# Altium PCB Therm_Expand_PCB_Bottom.PcbDoc (part 2 of 2)
Units mm, origin at the board's own origin, x right, y up, seen from the top; angles counter-clockwise.
Board outline 85 x 66 mm, 2 copper layers (Top Layer, Bottom Layer); 45 components, 65 nets, 228 pads, 143 vias.
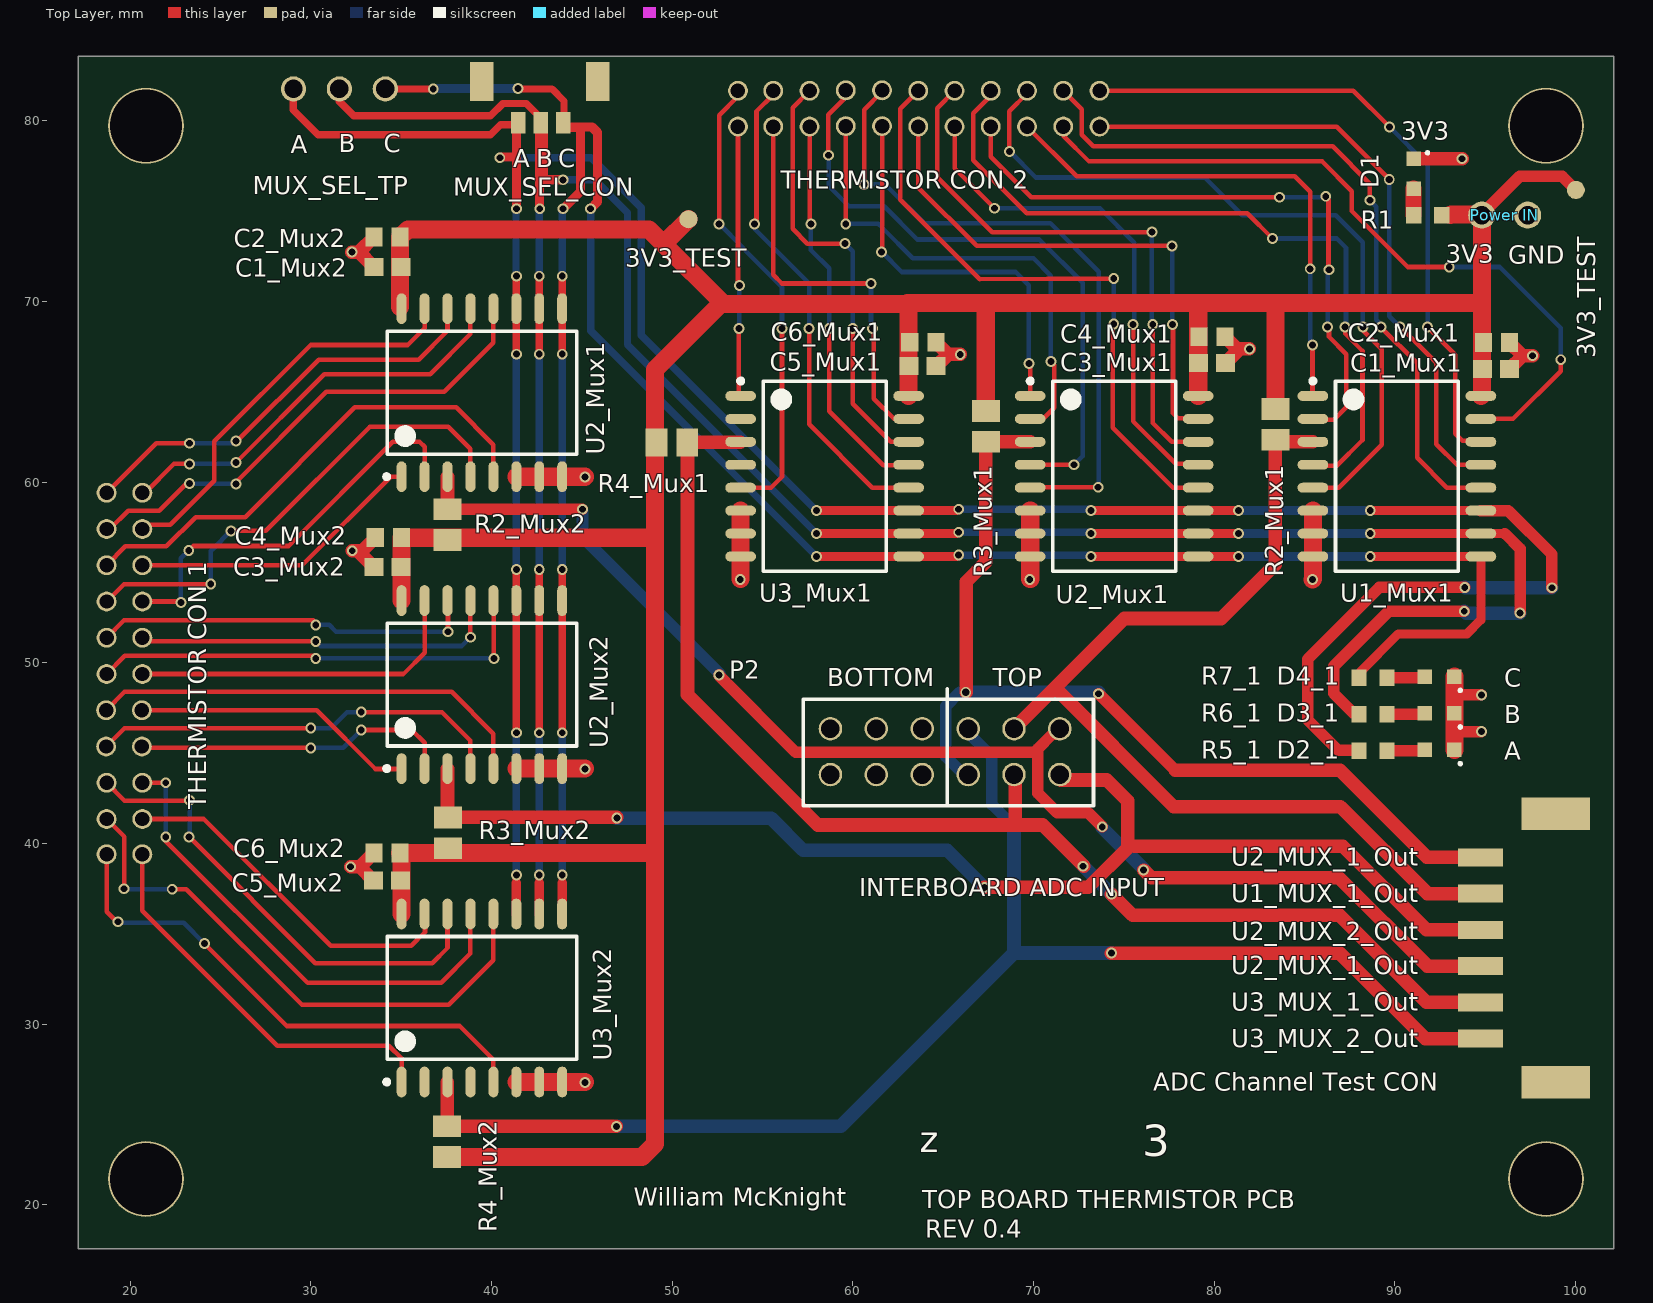
[diagram p0: Top Layer view]

## Via types
v1: diameter 0.6, hole 0.381, Top Layer to Bottom Layer, tented top, 141 vias
v2: diameter 0.6, hole 0.4, Top Layer to Bottom Layer, 2 vias

## Nets (pads, with @x,y where several pads share a name; then routed paths per layer and width w, separated by ;. In a path a pad name is that pad's centre, name@x,y a point inside that pad or via, vN(x,y) a via of type N, cw(c..) or ccw(c..) an arc to the next point about the centre after c; other vN are vias at no path point) (continued)
TS_IN15_U_AHK50H-ND_THERM_CONNECTOR2: (continued)
  Bottom Layer w0.254: v1@29.87,45.288 v1(29.997,45.288) 31.801,45.288 v1(32.791,46.279)
TS_IN16_U_AHK50H-ND_THERM_CONNECTOR1: "THERMISTOR CON 2.16" U2_Mux1.4@69.823,60.96 | length 34.7
  Top Layer w0.254: v1(58.661,78.092) 58.649,78.105 58.649,80.34 59.614,81.305 59.614,81.686 ; U2_Mux1.4@69.823,60.96 v1(72.238,60.96)
  Bottom Layer w0.254: v1(58.661,78.092) 58.661,76.391 59.131,75.921 59.792,75.26 61.747,75.26 63.576,73.431 70.333,73.431 72.72,71.044 72.72,61.443 v1(72.238,60.96)
TS_IN16_U_AHK50H-ND_THERM_CONNECTOR2: "THERMISTOR CON 1.16" U2_Mux2.4 | length 23.2
  Top Layer w0.254: 18.669,45.364 19.685,46.38 v1(29.997,46.38) ; v1(32.791,47.269) 37.262,47.269 38.837,45.695 U2_Mux2.4
  Bottom Layer w0.254: v1(29.997,46.38) 31.115,46.38 32.004,47.269 v1(32.791,47.269)
TS_IN17_U_AHK50H-ND_THERM_CONNECTOR1: "THERMISTOR CON 2.17" U3_Mux1.13 | length 21.8
  Top Layer w0.254: 57.607,79.68 57.607,74.295 v1@57.683,74.219 ; v1@58.699,68.555 58.699,63.932 61.697,60.935 63.07,60.935 U3_Mux1.13
  Bottom Layer w0.254: v1@57.683,74.219 57.683,72.847 58.699,71.831 v1@58.699,68.555
  other v1: 58.699,68.504 57.683,74.295
TS_IN17_U_AHK50H-ND_THERM_CONNECTOR2: "THERMISTOR CON 1.17" U3_Mux2.13 | length 27.5
  Top Layer w0.254: 20.676,43.358 v1(21.971,43.358) ; v1@21.92,40.361 21.946,40.335 21.946,40.157 29.82,32.283 37.211,32.283 38.837,33.909 U3_Mux2.13
  Bottom Layer w0.254: v1(21.971,40.361) v1(21.971,43.358)
TS_IN18_U_AHK50H-ND_THERM_CONNECTOR1: "THERMISTOR CON 2.18" U3_Mux1.14 | length 24.3
  Top Layer w0.254: 57.607,81.661 56.667,80.721 56.667,74.016 57.48,73.203 v1(59.563,73.203) ; v1@59.995,68.555 59.995,64.338 62.103,62.23 U3_Mux1.14
  Bottom Layer w0.254: v1(59.563,73.203) 59.995,72.771 v1@59.995,68.555
  other v1: 59.995,68.504
TS_IN18_U_AHK50H-ND_THERM_CONNECTOR2: "THERMISTOR CON 1.18" U3_Mux2.14 | length 26.6
  Top Layer w0.254: 18.694,43.358 19.685,42.367 23.216,42.367 23.292,42.291 v1(23.292,42.393) ; v1(23.266,40.361) 30.251,33.376 36.728,33.376 37.567,34.214 U3_Mux2.14
  Bottom Layer w0.254: v1(23.266,40.361) 23.266,40.462 23.292,40.488 v1(23.292,42.393)
TS_IN19_U_AHK50H-ND_THERM_CONNECTOR1: "THERMISTOR CON 2.19" U3_Mux1.15 | length 22.6
  Top Layer w0.254: 55.601,79.68 55.601,71.476 56.083,70.993 v1(61.011,70.993) ; v1@61.087,68.478 61.163,68.402 61.163,64.618 62.281,63.5 U3_Mux1.15
  Bottom Layer w0.254: v1(61.011,70.993) 61.011,68.555 v1@61.087,68.478
  other v1: 61.087,68.504
TS_IN19_U_AHK50H-ND_THERM_CONNECTOR2: "THERMISTOR CON 1.19" U3_Mux2.15 | length 19.9
  Top Layer w0.254: 20.676,41.351 24.079,41.351 31.105,34.325 35.55,34.325 36.322,35.097 36.322,36.019 36.271,36.07 U3_Mux2.15
TS_IN20_U_AHK50H-ND_THERM_CONNECTOR1: "THERMISTOR CON 2.20" U3_Mux1.12 | length 27.1
  Top Layer w0.254: v1(54.559,74.295) 54.67,74.405 54.67,80.52 55.601,81.451 55.601,81.661 ; v1(57.582,68.504) 57.582,63.195 61.087,59.69 U3_Mux1.12
  Bottom Layer w0.254: v1(54.559,74.295) 54.559,74.016 57.582,70.993 v1(57.582,68.504)
TS_IN20_U_AHK50H-ND_THERM_CONNECTOR2: "THERMISTOR CON 1.20" U3_Mux2.12 | length 31
  Top Layer w0.254: 18.694,41.351 19.685,40.361 v1@19.685,37.49 ; v1(22.327,37.465) 23.114,37.465 29.515,31.064 37.643,31.064 40.107,33.528 U3_Mux2.12
  Bottom Layer w0.254: v1(19.66,37.49) 19.685,37.465 v1(22.327,37.465)
TS_IN21_U_AHK50H-ND_THERM_CONNECTOR1: "THERMISTOR CON 2.21" U3_Mux1.1 | length 14.7
  Top Layer w0.254: 53.645,79.68 53.645,70.968 v1(53.721,70.891) ; v1@53.696,68.25 53.696,64.87 U3_Mux1.1
  Bottom Layer w0.254: v1(53.696,68.504) 53.721,68.529 v1(53.721,70.891)
TS_IN21_U_AHK50H-ND_THERM_CONNECTOR2: "THERMISTOR CON 1.21" U3_Mux2.1 | length 22.2
  Top Layer w0.254: 20.676,39.395 20.676,36.271 28.143,28.804 34.315,28.804 35.027,28.092 U3_Mux2.1
TS_IN22_U_AHK50H-ND_THERM_CONNECTOR1: "THERMISTOR CON 2.22" U3_Mux1.5 | length 25.5
  Top Layer w0.254: v1(52.603,74.295) 52.603,80.315 53.645,81.356 53.645,81.661 ; U3_Mux1.5 55.474,59.69 56.083,60.3 56.083,68.199
  Bottom Layer w0.254: v1(52.603,74.295) 53.924,72.974 53.899,72.974 56.083,70.79 v1(56.083,68.504)
TS_IN22_U_AHK50H-ND_THERM_CONNECTOR2: "THERMISTOR CON 1.22" U3_Mux2.5 | length 29.1
  Top Layer w0.254: 18.694,39.395 18.694,36.22 19.253,35.662 v1(19.329,35.662) ; v1(24.117,34.455) 28.677,29.896 38.252,29.896 40.107,28.042 U3_Mux2.5
  Bottom Layer w0.254: v1@19.393,35.611 22.962,35.611 v1(24.117,34.455)
pads on no net: "ADC Channel Test CON.7" "ADC Channel Test CON.8" MUX_SEL_CON.4 MUX_SEL_CON.5 P2.1 P2.2 P2.3 P2.4 P2.5 P2.6 U3_Mux1.2 U3_Mux1.4 U3_Mux2.2 U3_Mux2.4

## Polygon pours and split planes (outlines as drawn)
AGND on Bottom Layer "AGND" (solid, remove dead copper, pour order 0): 102.125,83.575 17.125,83.575 17.125,17.575 102.125,17.575 102.125,26.05

## Other copper
Bottom Layer:
  pour cut-out: 45.425,76.55 45.425,75.2 45.695,74.93 47.523,74.93

## Silkscreen, mask and mechanical layers (free items; w line width, h text height)
Top Overlay:
  lines w0.2: 65.225,42.375 65.225,42.075 ; 65.225,47.4 65.225,47.975 ; 65.225,48.55 65.225,47.975 ; 65.225,42.075 57.25,42.075 57.25,47.975 65.225,47.975 ; 65.225,42.075 73.325,42.075 73.325,47.975 65.225,47.975 ; 65.225,42.075 65.225,47.975
  text "3V3" at 90.35,78.95 h1
  text "B" at 31.55,78.25 h1
  text "C" at 34.025,78.25 h1
  text "A" at 28.9,78.2 h1
  text "A" at 41.2,77.425 h1
  text "B" at 42.467,77.425 h1
  text "C" at 43.7,77.425 h1
  text "3V3" at 92.825,72.15 h1
  text "GND" at 96.275,72.1 h1
  text "BOTTOM" at 58.575,48.7 h1
  text "TOP" at 67.75,48.7 h1
  text "C" at 96.05,48.675 h1
  text "B" at 96.05,46.65 h1
  text "A" at 96.05,44.625 h1
  text "U2_MUX_1_Out" at 80.963,38.773 h1
  text "INTERBOARD ADC INPUT" at 60.35,37.075 h1
  text "U1_MUX_1_Out" at 80.963,36.736 h1
  text "U2_MUX_2_Out" at 80.963,34.648 h1
  text "U2_MUX_1_Out" at 80.963,32.763 h1
  text "U3_MUX_1_Out" at 80.963,30.726 h1
  text "U3_MUX_2_Out" at 80.963,28.715 h1
  text "z" at 63.708,22.406 h2.5
  text "3" at 76.025,22.1 h3
  text "William McKnight" at 47.875,19.95 h1
  text "TOP BOARD THERMISTOR PCB" at 63.85,19.8 h1
  text "REV 0.4" at 64,18.175 h1
Bottom Overlay:
  lines w0.2: 65.25,42.325 65.25,42.025 ; 65.25,47.35 65.25,47.925 ; 65.25,48.5 65.25,47.925 ; 65.25,42.025 57.275,42.025 57.275,47.925 65.25,47.925 ; 65.25,42.025 73.35,42.025 73.35,47.925 65.25,47.925 ; 65.25,42.025 65.25,47.925
  text "THERMISTOR CON 2" at 92.225,80.95 h1
  text "B" at 32.15,78.25 h1
  text "C" at 34.7,78.25 h1
  text "A" at 29.575,78.2 h1
  text "22" at 54.266,77.225 h0.8
  text "20" at 56.222,77.225 h0.8
  text "18" at 58.162,77.225 h0.8
  text "16" at 60.169,77.225 h0.8
  text "14" at 62.175,77.225 h0.8
  text "12" at 64.182,77.225 h0.8
  text "10" at 66.189,77.225 h0.8
  text "8" at 67.862,77.225 h0.8
  text "6" at 69.935,77.225 h0.8
  text "4" at 71.942,77.225 h0.8
  text "2" at 73.925,77.225 h0.8
  text "THERMISTOR CON 1" at 18.975,77.15 h1 r90
  text "21" at 54.133,75.25 h0.8
  text "19" at 56.156,75.25 h0.8
  text "17" at 58.162,75.25 h0.8
  text "15" at 60.169,75.25 h0.8
  text "13" at 62.175,75.25 h0.8
  text "11" at 64.049,75.25 h0.8
  text "9" at 65.855,75.25 h0.8
  text "7" at 67.862,75.25 h0.8
  text "5" at 69.935,75.25 h0.8
  text "3" at 71.942,75.25 h0.8
  text "1" at 73.725,75.25 h0.8
  text "MUX SELECT TEST POINTS" at 36.6,74.15 h1
  text "3V3" at 95.475,72.125 h1
  text "GND" at 98.9,72.075 h1
  text "2" at 23.375,59.65 h0.8 r90
  text "1" at 25.35,59.45 h0.8 r90
  text "4" at 23.375,57.667 h0.8 r90
  text "3" at 25.35,57.667 h0.8 r90
  text "6" at 23.375,55.66 h0.8 r90
  text "5" at 25.35,55.66 h0.8 r90
  text "8" at 23.375,53.587 h0.8 r90
  text "7" at 25.35,53.587 h0.8 r90
  text "10" at 23.375,51.914 h0.8 r90
  text "9" at 25.35,51.58 h0.8 r90
  text "12" at 23.375,49.907 h0.8 r90
  text "11" at 25.35,49.774 h0.8 r90
  text "BOTTOM" at 63.975,48.65 h1
  text "TOP" at 70.9,48.625 h1
  text "14" at 23.375,47.9 h0.8 r90
  text "13" at 25.35,47.9 h0.8 r90
  text "16" at 23.375,45.894 h0.8 r90
  text "15" at 25.35,45.894 h0.8 r90
  text "18" at 23.375,43.887 h0.8 r90
  text "17" at 25.35,43.887 h0.8 r90
  text "20" at 23.375,41.947 h0.8 r90
  text "19" at 25.35,41.881 h0.8 r90
  text "22" at 23.375,39.991 h0.8 r90
  text "21" at 25.35,39.858 h0.8 r90
  text "3" at 89.45,19.15 h8
Board Outline:
  the board outline again, w0.1